# Altium PCB SLEEP ISO.PcbDoc
Units mm, origin at the board's own origin, x right, y up, seen from the top; angles counter-clockwise.
Board outline 25.91 x 27.05 mm, 2 copper layers (Top Layer, Bottom Layer); 27 components, 28 nets, 65 pads, 31 vias.
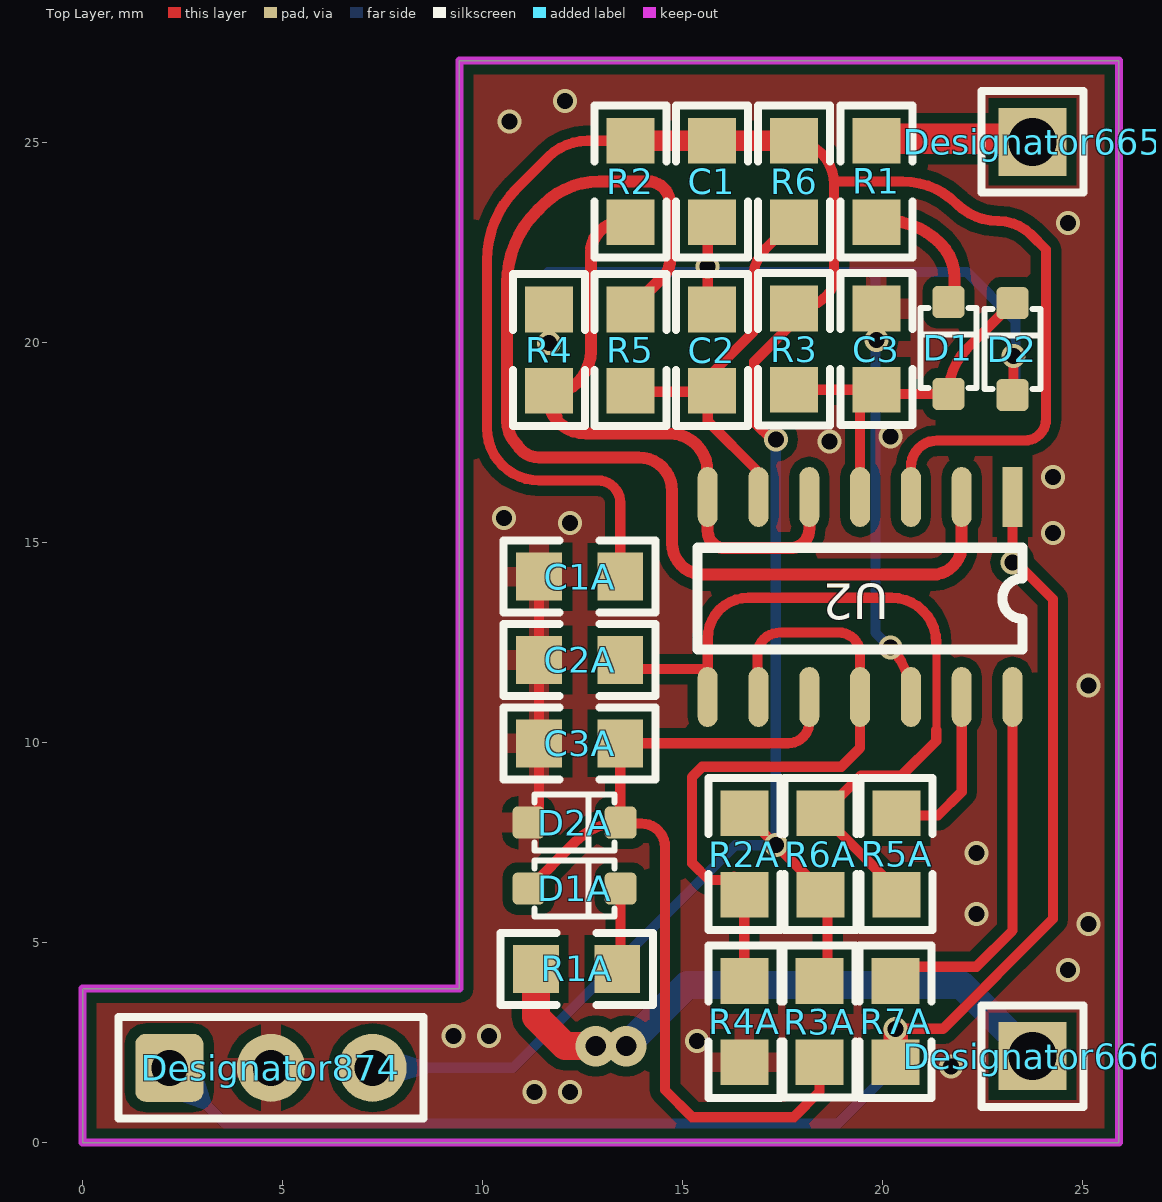
[diagram p0: Top Layer view]
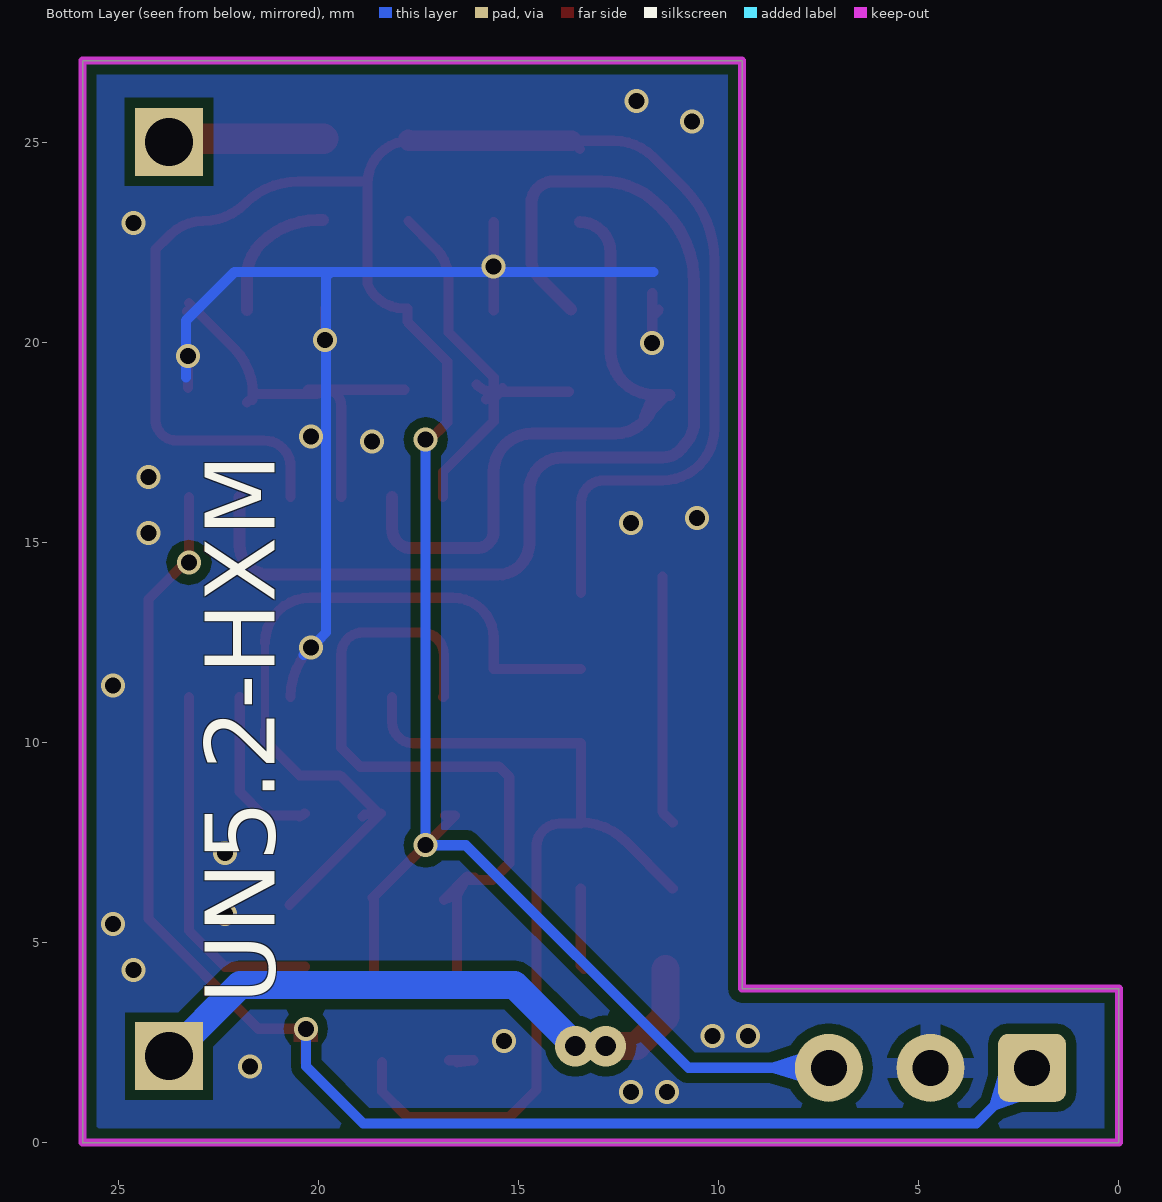
[diagram p1: Bottom Layer view, seen from below]

## Layer stack, top to bottom
Top Solder: solder mask 0.0102, Solder Resist, Dk 3.5
Top Layer: signal copper 0.0356
Dielectric1: dielectric 0.32, FR-4, Dk 4.8
Bottom Layer: signal copper 0.0356
Bottom Solder: solder mask 0.0102, Solder Resist, Dk 3.5

## Board outline
0,0 0,3.85 9.42,3.85 9.42,27.051 25.908,27.051 25.908,0

## Design rules (kind name [scope] priority, off if disabled: settings)
Clearance [All] p1: gap=0.254 ignorepadtopadclearanceinfootprint=FALSE except(0: Arc-Hole Track-Hole SMDPad-Hole THPad-Hole Via-Hole Fill-Hole Poly-Hole Region-Hole Text-Hole)
PolygonConnect isvia [All vs IsVia] p1: connectstyle=Direct reliefconductorwidth=0.254 reliefentries=4 polygonreliefangle="90 Angle" airgapwidth=0.254
PolygonConnect [All] p2: connectstyle=Relief reliefconductorwidth=0.508 reliefentries=4 polygonreliefangle="90 Angle" airgapwidth=0.254
RoutingVias [All] p1: holewidth=0.711 width=1.27 viastyle="Through Hole" minholewidth=0.711 minwidth=1.27 maxholewidth=0.711 maxwidth=1.27
SilkToSolderMaskClearance SilkscreenOverComponentPads [IsPad] p1: minsilkscreentomaskgap=0.254 clearancetoexposedcopper=TRUE
SolderMaskExpansion [All] p1: expansion=0.102 istentingtop=FALSE
Width [All] p1: maxlimit=5.08 minlimit=0.152 preferedwidth=5.08
29 further rules are at their usual default settings.

## Components (designator, comment, footprint, x,y, rotation, side; value= is the part's Value field where it differs from the comment)
C1 "334P" cap-0805 15.73,24.028 r90 top
C1A "334P" cap-0805 12.428,14.148 r0 top
C2 "334P" cap-0805 15.73,19.812 r270 top
C2A "334P" cap-0805 12.428,12.065 r0 top
C3 "202P" cap-0805 19.845,19.837 r270 top
C3A "202P" cap-0805 12.428,9.982 r0 top
D1 "T4/4148" SOD-323 21.648,19.863 r90 top (schematic designator ESD1)
D1A "T4/4148" SOD-323 12.301,6.35 r0 top (schematic designator ESD1)
D2 "T4/4148" SOD-323 23.249,19.837 r90 top (schematic designator ESD1)
D2A "T4/4148" SOD-323 12.301,8.001 r0 top (schematic designator ESD1)
Designator665 "Comment" HDR-1X1 23.749,25.019 r0 top
Designator666 "Comment" HDR-1X1 23.749,2.159 r0 top
Designator874 "Comment" HDR-1X3 2.17,1.87 r0 top
R1 "200K" res-0805_2 19.845,24.028 r270 top
R1A "200K" res-0805_2 12.352,4.343 r180 top
R2 "3K" res-0805_2 13.698,24.028 r90 top
R2A "3K" res-0805_2 16.543,7.214 r90 top
R3 "10M" res-0805_2 17.788,19.837 r90 top
R3A "10M" res-0805_2 18.423,3.023 r270 top
R4 "3K" res-0805_2 11.666,19.812 r270 top
R4A "3K" res-0805_2 16.543,3.023 r90 top
R5 "3K" res-0805_2 13.698,19.812 r270 top
R5A "3K" res-0805_2 20.353,7.214 r270 top
R6 "470K" res-0805_2 17.788,24.028 r270 top
R6A "470K" res-0805_2 18.448,7.214 r90 top
R7A "3K" res-0805_2 20.328,3.023 r90 top
U2 "LM339" SOP14_L 19.439,13.64 r270 top

## Footprints (in the part's own frame and the unit in brackets; to place one, negate y for a bottom-side part, rotate by r counter-clockwise, add the part's x,y. Pads: shape width x height; smd on the part's side, far side on the other; paste and mask are expansions set on the pad)
cap-0805 [mm]
  rect 1.14x1.2 smd: 1(-1.016,0) 2(1.016,0)
  silkscreen extent -1.91,-0.9 1.9,0.9, body extent -1,-0.6 1,0.6, height 1.2
HDR-1X1 [mm]
  rect 1.7x1.7 hole 1.2: 1(0,0)
  silkscreen extent -1.27,-1.27 1.27,1.27, body extent -1.27,-1.27 1.27,1.27, height 8.5
HDR-1X3 [mm]
  rrect30% 1.7x1.7 hole 0.9: 1(0,0)
  round 1.7 hole 0.9: 2(2.54,0) 3(5.08,0)
  silkscreen extent -1.27,-1.27 6.35,1.27, body extent -1.27,-1.27 6.35,1.27, height 8.5
res-0805_2 [mm]
  rect 1.14x1.2 smd: 1(-1.016,0) 2(1.016,0)
  silkscreen extent -1.91,-0.9 1.9,0.9, body extent -1,-0.62 1,0.63, height 0.45
SOD-323 [mm]
  rrect30% 0.8x0.8 smd: 1(-1.15,0) 2(1.15,0)
  silkscreen extent -1,-0.7 1,0.7, body extent -1.3,-0.65 1.3,0.65, height 1
SOP14_L [mm]
  rect 1.5x0.5 smd: 1(-2.5,3.81)
  oval 1.5x0.5 smd: 2(-2.5,2.54) 3(-2.5,1.27) 4(-2.5,0) 5(-2.5,-1.27) 6(-2.5,-2.54) 7(-2.5,-3.81) 8(2.5,-3.81) 9(2.5,-2.54) 10(2.5,-1.27) 11(2.5,0) 12(2.5,1.27) 13(2.5,2.54) 14(2.5,3.81)
  silkscreen extent -1.23,-4.06 1.31,4.06, body extent -3,-4.35 3,4.35, height 1.9

## Via types
v1: diameter 0.6, hole 0.4, Top Layer to Bottom Layer, tented both sides, 29 vias
v2: diameter 1.016, hole 0.508, Top Layer to Bottom Layer, tented both sides, 2 vias

## Nets (pads, with @x,y where several pads share a name; then routed paths per layer and width w, separated by ;. In a path a pad name is that pad's centre, name@x,y a point inside that pad or via, vN(x,y) a via of type N, cw(c..) or ccw(c..) an arc to the next point about the centre after c; other vN are vias at no path point)
3.3V: C1.2 C1A.2 Designator874.3 R2.2 R2A.2 R3.2 R3A.1 R6.1 R6A.1 U2.3 | length 75
  Top Layer w0.254: C1A.2@13.444,13.741 C1A.2 13.444,15.993 ccw(c12.885,15.993) 12.885,16.552 11.416,16.552 cw(c11.416,17.86) 10.491,16.935 cw(c11.409,17.852) 10.111,17.852 10.111,22.056 cw(c12.651,22.056) 10.855,23.852 11.641,24.638 cw(c12.622,23.657) 12.622,25.044 13.673,25.044 13.47,24.841 R2.2 ; 16.797,18.974 16.789,18.966 ; R2A.2@16.848,8.179 16.594,8.179 R6A.1@18.626,6.147 ; v1@17.272,17.526 16.789,18.009 16.789,18.966 ; R6.1@17.711,25.044 cw(c17.711,23.968) 18.788,23.968 ; R3.2 17.788,20.523 16.789,19.525 16.789,18.966 ; R3.2@17.864,20.853 ccw(c17.864,21.86) 18.788,21.461 18.788,23.968 ; R6A.1@18.651,6.121 R6A.1@18.626,6.147 ; R3A.1@18.778,4.064 18.626,4.216 R6A.1@18.626,6.147 ; U2.3 20.709,16.891 cw(c21.369,16.891) 21.369,17.551 23.553,17.551 ccw(c23.553,18.085) 24.087,18.085 24.087,22.327 23.717,22.697 ccw(c22.893,21.873) 22.893,23.038 cw(c22.893,24.51) 21.852,23.469 ccw(c20.502,22.118) 20.502,24.028 18.934,24.028 ccw(c18.934,23.822) 18.788,23.968
  Top Layer w0.508: R2.2@13.673,25.044 R2.2 C1.2 17.711,25.044 17.737,25.044 ccw(c17.737,25.07) R6.1@17.762,25.07
  Bottom Layer w0.2: Designator874.3@7.62,1.524 8.763,1.87 Designator874.3@7.874,2.159
  Bottom Layer w0.254: Designator874.3 10.76,1.87 16.325,7.435 v1(17.33,7.435) v1(17.33,17.577)
$Net0: 
$Net15: 
$Net29: 
$Net30: 
$Net31: 
$Net32: 
$Net45: 
$Net123: 
$Net124: 
$Net156: 
$Net157: 
$Net158: 
GND: C1.1 C1A.1 C2.1 C2A.1 C3.1 C3A.1 D2.1 D2A.1 Designator874.2 R4.1 R4A.1 U2.12 | length 37.4
  Top Layer w0.254: D2A.1 11.412,8.262 C3A.1 C2A.1 C1A.1 ; R4.1@11.514,20.828 ccw(c11.615,20.828) R4.1@11.615,20.726 ; v1(11.666,19.99) R4.1@11.666,21.234 ; C2.1@15.629,20.803 v1(15.629,21.907) C1.1@15.629,23.012 ; R4A.1 16.137,2.057 R4A.1@16.746,2.057 ; C3.1@19.82,20.879 C3.1 v1@19.845,19.964 ; v1(20.198,12.372) cw(c18.966,11.14) U2.12 ; D2.1@23.274,18.865 v1(23.274,19.66)
  Bottom Layer w0.254: 11.641,21.768 19.693,21.768 ; v1@20.378,12.192 20.023,12.548 19.82,12.751 19.82,21.641 19.693,21.768 ; 23.325,19.126 23.325,20.549 22.106,21.768 19.82,21.768 19.693,21.768
  other v1: 11.303,1.27 12.192,1.27 21.717,1.905 15.367,2.54 9.271,2.667 10.16,2.667 24.638,4.318 25.146,5.461 22.352,5.715 22.352,7.239 25.146,11.43 24.257,15.24 12.192,15.494 10.541,15.621 24.257,16.637 18.669,17.526 20.193,17.653 19.845,20.066 24.638,22.987 10.668,25.527 12.065,26.035
NewNet1: R5.1 U2.2 | length 30.1
  Top Layer w0.3: R5.1 14.509,21.639 ccw(c14.076,22.073) 14.689,22.073 14.689,23.47 ccw(c14.13,23.47) 14.13,24.028 12.924,24.028 ccw(c12.924,22.034) 11.514,23.445 11.36,23.291 ; U2.2 21.979,14.935 cw(c21.242,14.935) 21.242,14.199 15.527,14.199 cw(c15.527,14.986) 14.74,14.986 14.74,16.291 ccw(c13.901,16.291) 13.901,17.129 11.415,17.129 cw(c11.415,17.776) 10.856,17.451 cw(c11.434,18.03) 10.616,18.03 10.616,21.494 ; 10.616,21.494 cw(c13.156,21.494) 11.36,23.291 ; 10.616,21.494 cw(c13.156,21.494) 11.36,23.291
NewNet1A: R5A.1 U2.13 | length 4.3
  Top Layer w0.254: R5A.1 20.48,8.153 20.455,8.179 21.387,8.179 21.979,8.771 U2.13
NewNet2: C2.2 R5.2 R6.2 U2.6 | length 11.5
  Top Layer w0.254: R5.2@13.749,18.771 C2.2@15.603,18.771 ; C2.2@15.412,18.86 ccw(c15.629,19.077) C2.2@15.629,18.771 ; C2.2@15.531,18.694 ccw(c15.531,18.868) C2.2@15.629,18.724 ; C2.2@16.062,18.95 cw(c15.629,19.384) C2.2@15.629,18.771 ; U2.6 16.899,16.764 15.629,18.034 C2.2@15.629,18.724 ; R6.2@17.762,23.038 17.087,22.362 ccw(c17.885,21.564) 16.756,21.564 16.756,20.253 15.629,19.126 C2.2@15.629,18.771 ; C2.2@15.603,18.771 C2.2@15.629,18.771 ; C2.2@15.603,18.771 15.825,18.575 15.654,18.745 cw(c15.531,18.868) 15.643,18.735 cw(c15.531,18.868) C2.2@15.629,18.724 ; C2.2@15.629,18.724 C2.2@15.629,18.771
NewNet2A: C2A.2 R5A.2 R6A.2 U2.8 | length 19.7
  Top Layer w0.2: 21.344,10.317 21.344,12.497
  Top Layer w0.254: C2A.2@13.444,11.836 15.629,11.836 15.629,12.606 cw(c16.645,12.606) 16.645,13.622 20.219,13.622 cw(c20.219,12.497) 21.344,12.497 ; R6A.2@18.905,8.153 18.854,8.204 R6A.2 ; R5A.2@20.734,5.944 18.702,7.976 R6A.2 ; 21.344,10.317 21.344,10.041 20.484,9.181 19.468,9.181 18.517,8.23 R6A.2
NewNet3: C3.2 D1.1 D2.2 R3.1 U2.4 | length 10.8
  Top Layer w0.254: R3.1@17.864,18.821 C3.2 ; U2.4 19.439,18.415 cw(c19.845,18.415) C3.2 ; C3.2@20.273,18.821 C3.2 ; D1.1@21.801,18.51 ccw(c21.661,18.37) 21.661,18.567 D1.1@21.661,18.917 ; D2.2@23.002,20.784 D2.2@23.045,20.784 ; D2.2 D2.2@23.045,20.784 ; D2.2@23.299,20.784 D2.2@23.045,20.784 ; C3.2 ccw(c20.107,19.084) 20.107,18.713 D1.1 cw(c23.277,18.713) D1.1@21.661,18.917 ; D1.1@21.661,18.917 cw(c23.277,18.713) 22.125,19.864 D2.2@23.045,20.784
NewNet3A: C3A.2 D1A.1 D2A.2 R3A.2 U2.10 | length 23.2
  Top Layer w0.254: D1A.1 12.343,7.542 cw(c13.451,6.434) D2A.2 ; U2.10 18.169,10.516 cw(c17.635,10.516) 17.635,9.982 C3A.2 13.444,8.008 D2A.2 ; R3A.2 18.423,1.278 17.78,0.635 15.24,0.635 14.562,1.313 14.562,7.391 ccw(c13.978,7.391) 13.978,7.976 13.477,7.976 cw(c13.477,8.001) D2A.2
NewNet4: R2.1 R4.2 U2.5 U2.7 | length 17.6
  Top Layer w0.3: R2.1@13.47,23.012 ccw(c13.47,22.25) 12.708,22.25 12.708,19.787 cw(c11.615,19.787) R4.2@11.615,18.694 ; U2.5 18.169,15.342 cw(c17.686,15.342) 17.686,14.859 16.06,14.859 cw(c16.06,15.291) 15.629,15.291 U2.7 15.629,16.764 ccw(c14.663,16.764) 14.663,17.729 12.581,17.729 cw(c12.581,18.694) R4.2@11.696,18.31 ; R4.2@11.615,18.694 ccw(c12.581,18.694) R4.2@11.696,18.31 ; R4.2@11.615,18.694 11.234,18.694 11.336,18.669 R4.2@11.696,18.31 ; R4.2@11.615,18.694 11.85,18.155 R4.2@11.696,18.31
NewNet4A: R2A.1 R4A.2 U2.9 U2.11 | length 19
  Top Layer w0.254: R2A.1@16.111,6.629 cw(c16.111,6.198) R2A.1@16.339,6.564 ; R4A.2@16.543,4.166 R2A.1 ; U2.9 cw(c16.899,11.165) 16.873,11.165 16.873,12.192 cw(c17.432,12.192) 17.432,12.751 18.905,12.751 cw(c18.905,12.217) 19.439,12.217 U2.11 19.439,9.862 19.43,9.862 18.967,9.398 15.494,9.398 15.24,9.144 15.24,6.985 15.661,6.564 R2A.1@16.339,6.564 ; R2A.1@16.339,6.564 cw(c16.111,6.198) R2A.1 ; R2A.1 16.873,6.071 16.289,6.655 R2A.1
NewNet5: D1.2 R1.2 | length 3.5
  Top Layer w0.3: R1.2@19.896,23.063 20.035,23.063 cw(c20.035,21.069) 21.445,22.479 cw(c20.587,21.621) 21.801,21.621 D1.2@21.801,20.81
NewNet5A: D1A.2 R1A.1 | length 2
  Top Layer w0.254: R1A.1 13.451,4.427 D1A.2
NewNet6: Designator874.1 R7A.1 U2.1 | length 38.8
  Top Layer w0.254: R7A.1 v1(20.328,2.845) 21.514,2.845 24.257,5.588 24.257,13.589 23.343,14.503 v1(23.249,14.503) U2.1
  Bottom Layer w0.2: Designator874.1@2.413,1.143 3.151,0.889 Designator874.1@2.921,1.651
  Bottom Layer w0.254: Designator874.1 3.559,0.481 18.896,0.481 20.32,1.905 20.32,2.837 v1(20.328,2.845) v1@20.302,2.87
NewNet6A: R7A.2 U2.14 | length 9.7
  Top Layer w0.254: R7A.2@20.353,4.013 cw(c20.353,4.039) R7A.2 20.759,4.216 R7A.2@20.759,4.089 ; R7A.2@20.353,4.394 22.345,4.394 23.249,5.298 U2.14
NewNet7: Designator665.1 R1.1 | length 3.9
  Top Layer w0.762: R1.1@19.896,25.095 23.673,25.095 Designator665.1
NewNet7A: Designator666.1 R1A.2 | length 16
  Top Layer w0.7: R1A.2 11.336,3.142 12.065,2.413 v2(12.827,2.413) v2(13.589,2.413)
  Bottom Layer w0.7: v2(12.827,2.413) v2(13.589,2.413) 15.113,3.937 21.971,3.937 Designator666.1

## Polygon pours and split planes (outlines as drawn)
GND on Top Layer "Bottom Layer-No Net" (solid, pour order 8): 0,3.85 0,0.508 0.508,0 25.273,0 25.4,0 25.908,0.508 25.908,26.416 25.273,27.051 10.055,27.051 9.42,26.416 9.42,3.85 0,3.85
GND on Bottom Layer "Bottom Layer-No Net" (solid, pour order 6): 0,3.85 9.42,3.85 9.42,26.438 10.033,27.051 25.273,27.051 25.908,26.416 25.908,0.762 25.146,0 0,0 0,3.85

## Keep-outs
Keep-Out Layer:
  lines w0.2: 0,0 0,3.85 9.42,3.85 9.42,27.051 25.908,27.051 25.908,23.241 25.908,21.59 25.908,5.334 25.908,3.683 25.908,0 9.42,0 0,0

## Other copper
Top Layer:
  region net NewNet6: 20.023,2.87 20.023,2.515 20.632,2.515 20.632,2.87

## Silkscreen, mask and mechanical layers (free items; w line width, h text height)
Bottom Overlay:
  text "UN5.2-HXM" at 20.531,3.454 h3 r270